# EAGLE board Lighting IC test V2 (EAGLE 9.2.2)
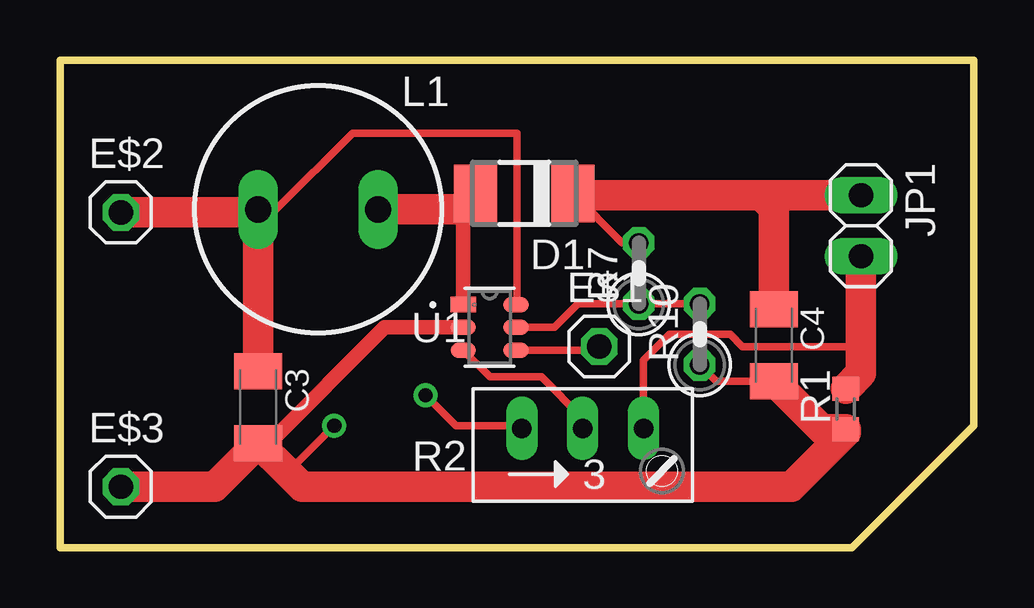
[diagram p0: board, top side]
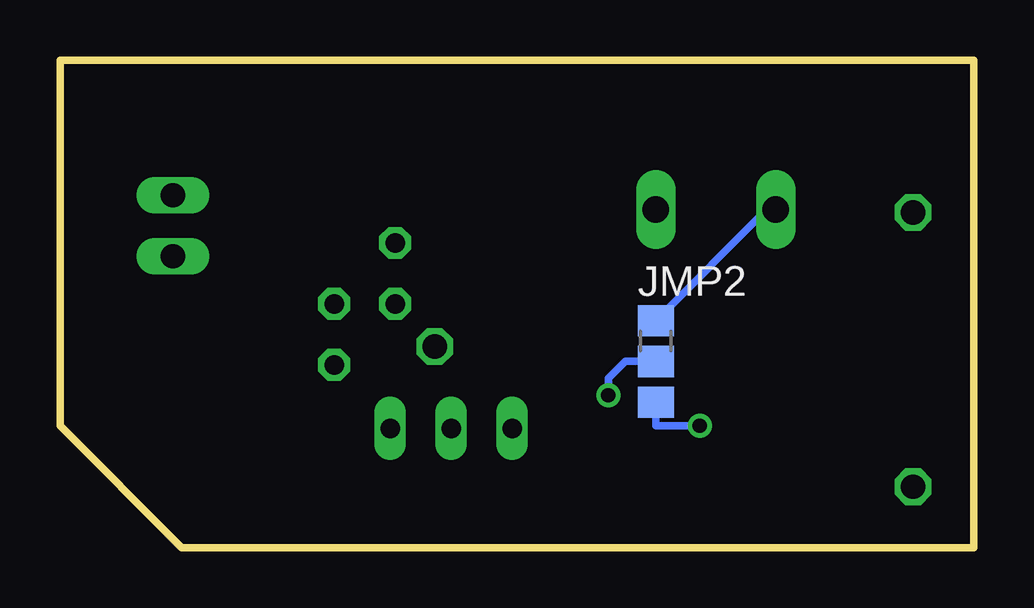
[diagram p1: board, bottom side, seen from below]

Size 38.1 x 20.32 mm. Coordinates in mm from the lower left corner, seen from the top.
Outline: 0,20.32 0,0 33.02,0 38.1,5.08 38.1,20.32 0,20.32
Copper layers (1*16): Top 0.035mm / dielectric 1.5mm / Bottom 0.035mm
Design rules "default": minimum track width 6mil, minimum drill 0.35mm, track to track 6mil, track to pad 6mil, pad to pad 6mil, via to via 6mil, smd to smd 6mil, copper to edge 40mil, drill to drill 6mil, minimum pad ring 10mil, minimum via ring 8mil, stop-mask expansion 4mil, vias tented up to drill 0mil, thermal gap 10mil
Net classes: 0 default: width 0.254 mm, clearance 0.152 mm

## Footprints (pad centres in the part's own frame; a part is rotated, then mirrored left to right if it is on the bottom)
C1206K = smd 1.5 x 2: 1 -1.5,0; 2 1.5,0
DO-214AC = smd 1.8 x 2.4: A 2.025,0; C -2.025,0
1X01 = drill 1.016 octagon: 1 0,0
A0R-JMP = smd 1.5 x 1.3: 1 0,1.7; 2 0,0; 3 0,-1.7
1X02 = drill 1.016 long: 1 -1.27,0; 2 1.27,0
SD12K100 = drill 1.1 long: 1 -2.5,0; 2 2.5,0
R0603 = smd 1 x 1.1: 1 -0.85,0; 2 0.85,0
RJ9W = drill 0.813 long: A 2.54,0.635; E -2.54,0.635; S 0,0.635
0207/2V = drill 0.813 octagon: 1 -1.27,0; 2 1.27,0
SOT23-6 = smd 1.06 x 0.65: 1 -1.1,0.95; 2 -1.1,0; 3 -1.1,-0.95; 4 1.1,-0.95; 5 1.1,0; 6 1.1,0.95

## Placement (x,y rotation side)
C3  10u  [C1206K]  8.27,5.86 270 top
C4  10u  [C1206K]  29.75,8.43 270 top
D1  [DO-214AC]  19.35,14.76 180 top
E$1  [1X01]  22.48,8.38 0 top
E$2  [1X01]  2.54,13.97 0 top
E$3  [1X01]  2.54,2.54 0 top
JMP2  0R-JUMPA  [A0R-JMP]  13.26,7.76 0 bottom
JP1  TAIL  [1X02]  33.39,13.41 270 top
L1  [SD12K100]  10.76,14.09 0 top
R1  820m  [R0603]  32.75,5.78 90 top
R2  [RJ9W]  21.79,4.34 0 top
R7  10k  [0207/2V]  24.13,11.43 90 top
R10  10k  [0207/2V]  26.67,8.89 90 top
U1  AP3031KTR-G1  [SOT23-6]  17.91,9.18 0 top

## Library data of the parts
C3 C4 = rcl; SPICEPREFIX: C
D1 = diode
E$1-E$3 JP1 = pinhead
JMP2 = jump-0r-smd
L1 = inductor-neosid; OC_FARNELL: unknown; OC_NEWARK: unknown
R1 R7 R10 = resistor
R2 = pot
U1 = Lighting IC; MANUFACTURER_PART_NUMBER: AP3031KTRG1; VENDOR: Diodes Inc

## Nets
GND: C3.2 C4.2 E$3.1 JMP2.3 R1.1 R10.1 U1.2
N$1: D1.A L1.2 U1.1
N$3: C4.1 D1.C JP1.1 R7.2
N$6: R2.S U1.3
N$7: JP1.2 R1.2 R2.A
N$8: JMP2.2 R2.E
N$10: E$1.1 U1.4
N$20: R7.1 R10.2 U1.5
VCC: C3.1 E$2.1 JMP2.1 L1.1 U1.6

## Tracks (layer width: path | path; a pad name or v marks a point on that pad's centre or on a via)
GND  (via drill 0.6)
  Top 0.305: v11.43,5.08 9.49,3.14 | R10.1 27.36,6.93 C4.2
  Top 0.61: U1.2 13.53,9.18 8.71,4.36
  Top 0.813: 8.71,4.36 C3.2
  Top 1.27: C4.2 31.75,4.93 R1.1 32.75,4.81 30.48,2.54 10.09,2.54 9.49,3.14 C3.2 6.45,2.54 E$3.1
  Bottom 0.254: 12.83,5.63 JMP2.3
  Bottom 0.305: JMP2.3 13.26,5.08 v11.43,5.08
N$1
  Top 0.61: U1.1 16.81,14.2
  Top 0.813: 16.81,14.2 16.79,14.22
  Top 1.27: L1.2 16.66,14.09 16.79,14.22 D1.A
N$3
  Top 0.305: 21.38,14.19 D1.C 23.43,12.7 R7.2
  Top 1.27: D1.C 21.45,14.68 29.21,14.68 | JP1.1 29.21,14.68 | 29.21,14.68 29.75,14.14 C4.1
N$6
  Top 0.254: 21.79,5.39 R2.S
  Top 0.305: U1.3 17.93,7.11 20.07,7.11 21.79,5.39
N$7
  Top 0.305: R2.A 24.33,7.82 25.4,8.89 27.94,8.89 28.45,8.38 33.39,8.38
  Top 1.27: R1.2 33.39,7.27 33.39,8.38 JP1.2
N$8  (via drill 0.6)
  Top 0.305: R2.E 19.14,5.08 16.51,5.08 v15.24,6.35
  Bottom 0.305: JMP2.2 14.53,7.76 15.24,7.05 v15.24,6.35
N$10
  Top 0.305: U1.4 22.33,8.23 E$1.1
N$20
  Top 0.305: U1.5 20.61,9.18 21.59,10.16 R10.2
VCC
  Top 0.305: L1.1 9.01,14.09 12.19,17.27 19.05,17.27 19.05,10.17 U1.6
  Top 1.27: L1.1 | L1.1 C3.1 | E$2.1 8.15,13.97 L1.1
  Bottom 0.305: JMP2.1 8.63,14.09 L1.1